# Altium PCB Radios_Comunitarias.PcbDoc (part 1 of 2)
Units mil, origin at the board's own origin, x right, y up, seen from the top; angles counter-clockwise.
Board outline 5905.51 x 3937.01 mil, 2 copper layers (Top Layer, Bottom Layer); 217 components, 199 nets, 908 pads, 113 vias.
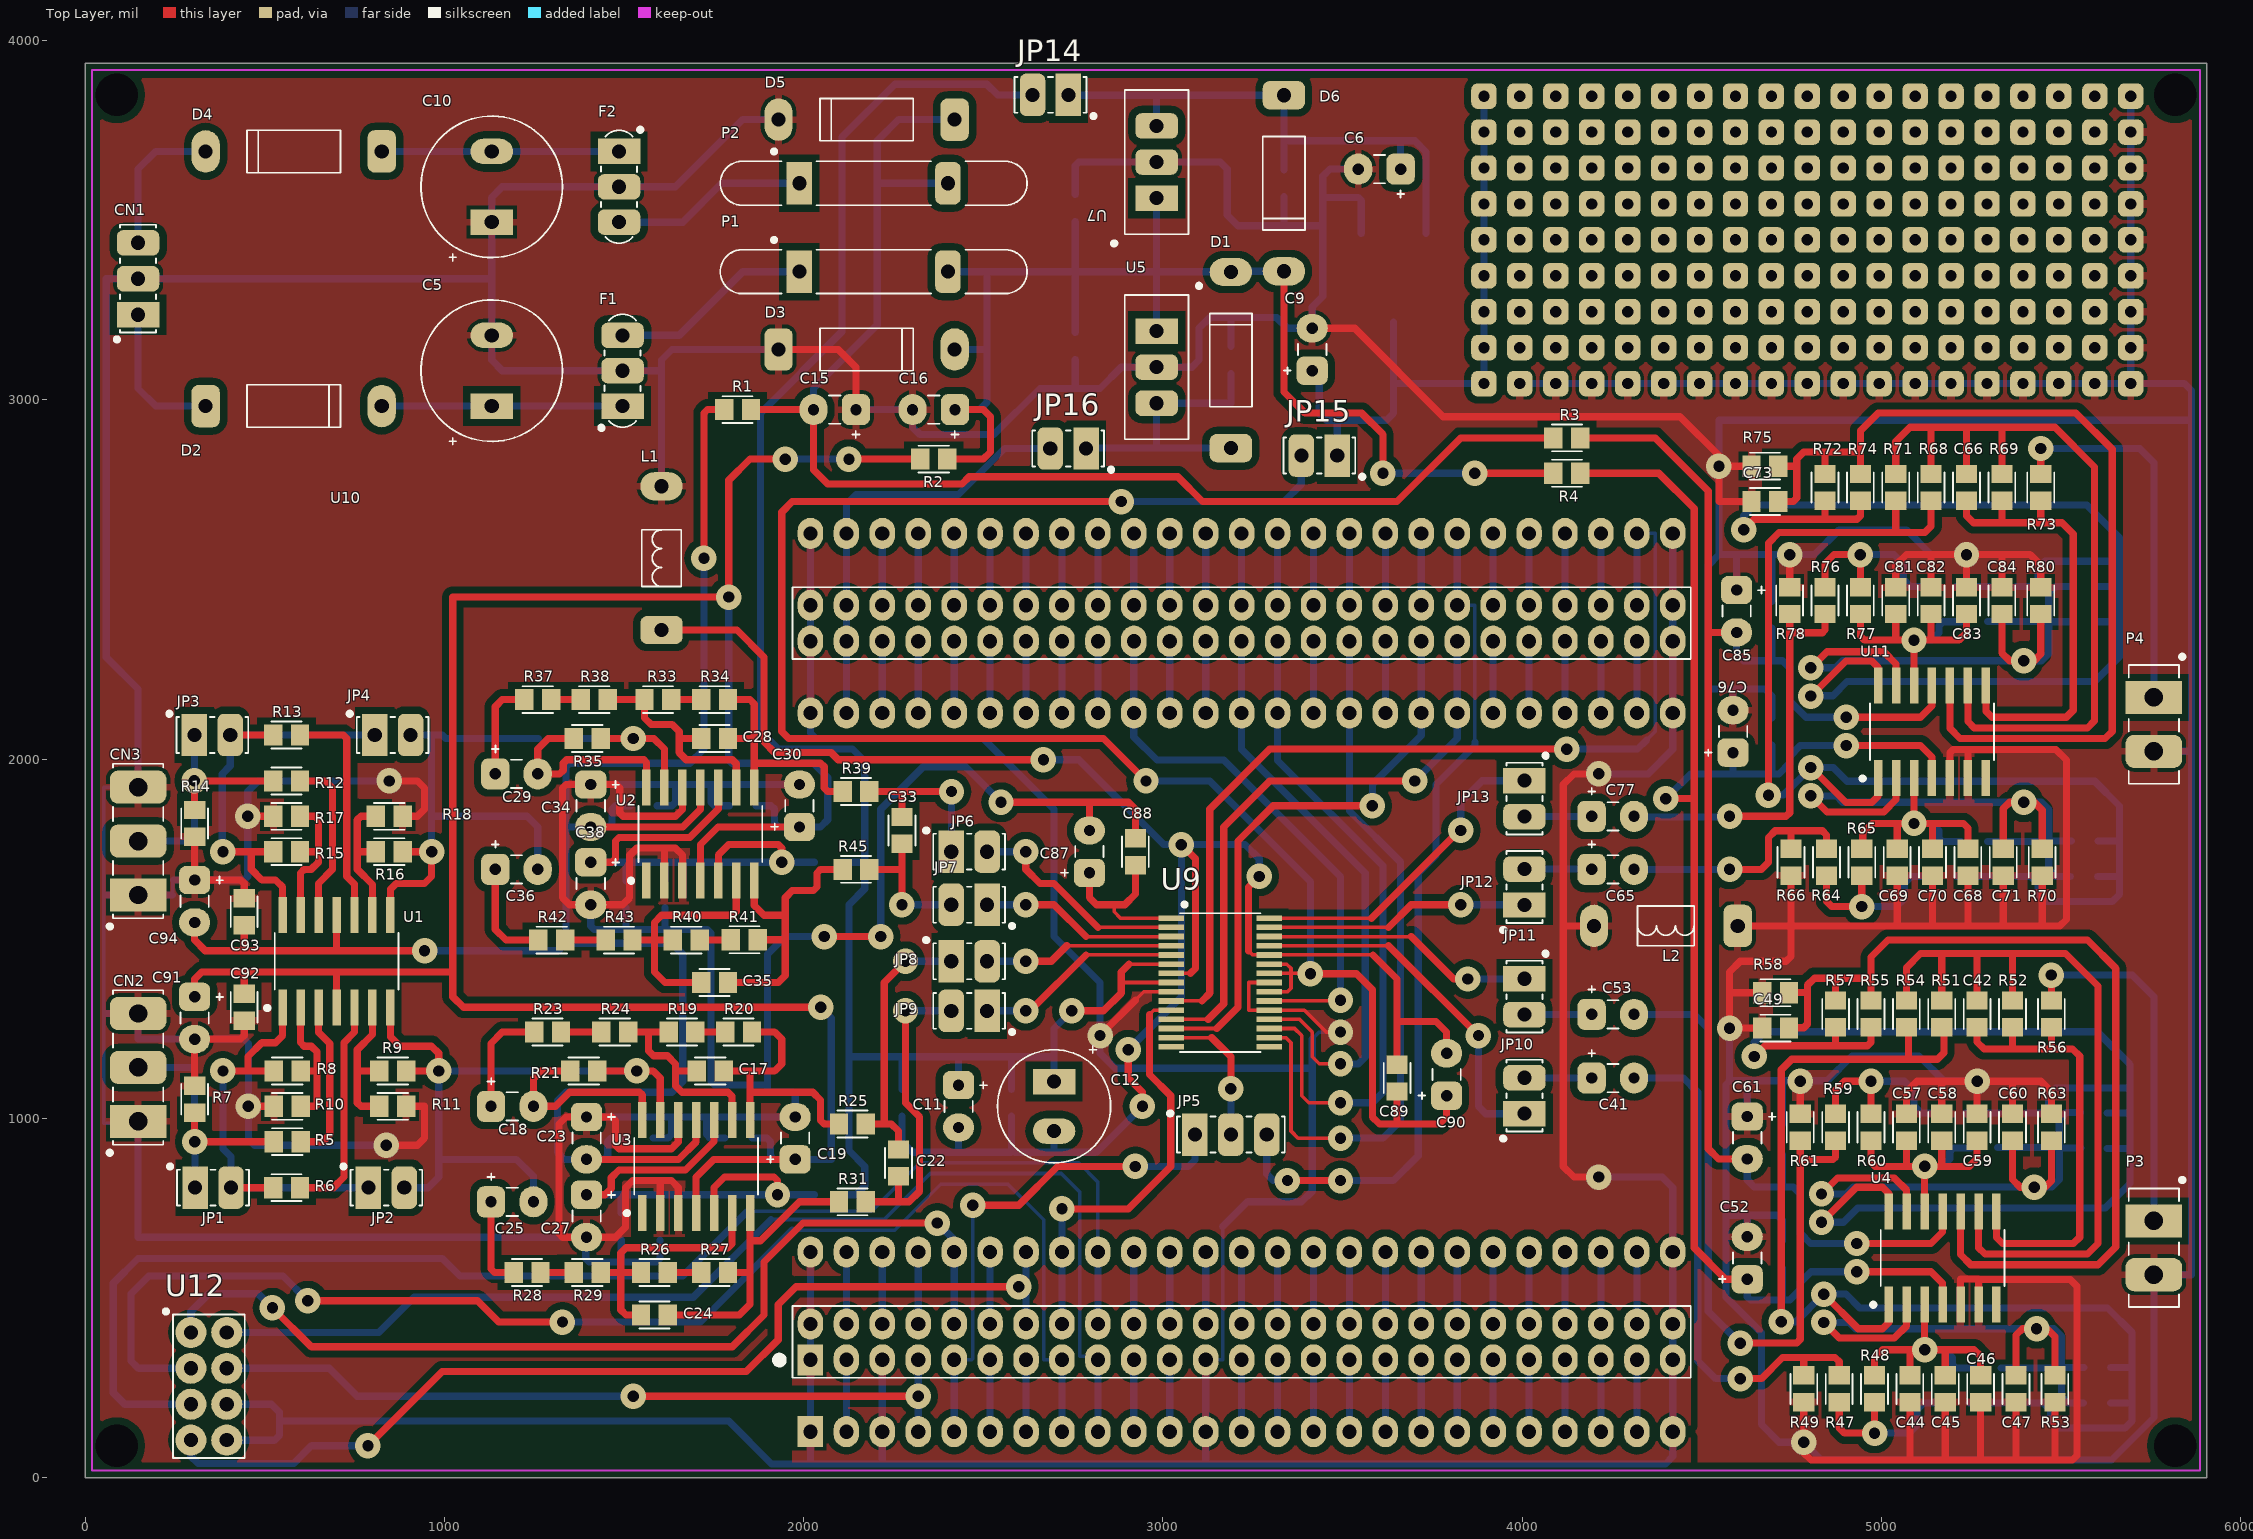
[diagram p0: Top Layer view]
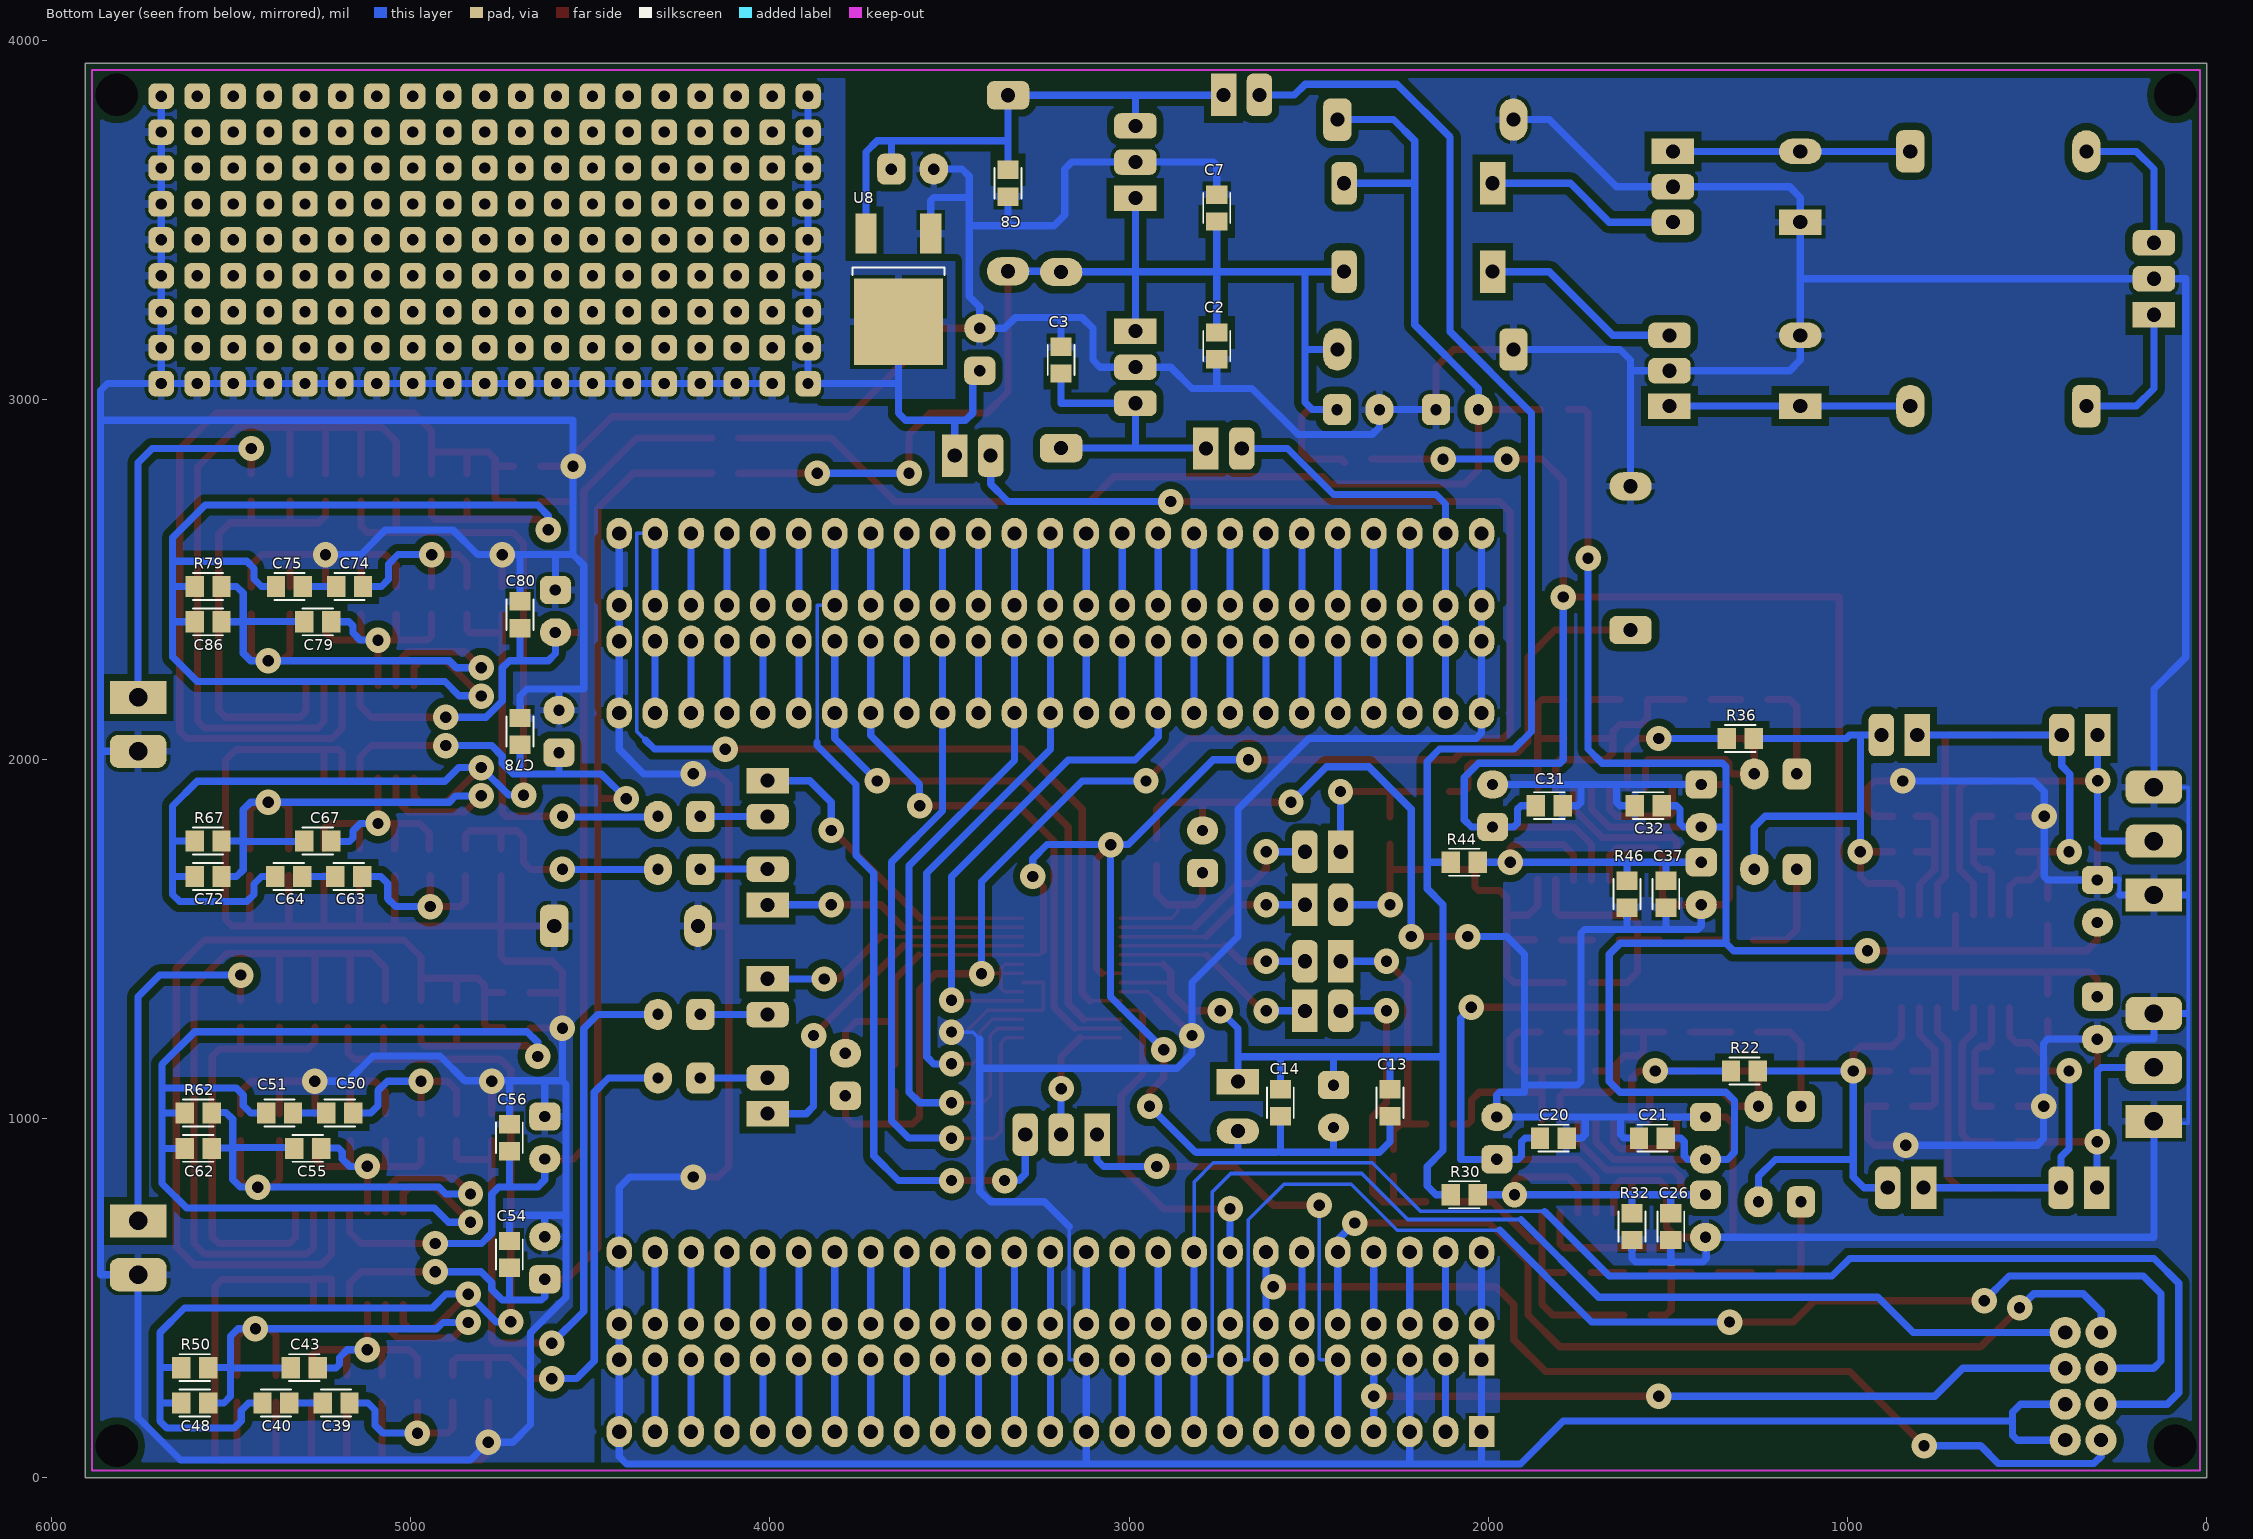
[diagram p1: Bottom Layer view, seen from below]

## Layer stack, top to bottom
Top Solder: solder mask 0.4, Solder Resist, Dk 3.5
Top Layer: signal copper 1.4
Dielectric1: dielectric 12.6, FR-4, Dk 4.8
Bottom Layer: signal copper 1.4
Bottom Solder: solder mask 0.4, Solder Resist, Dk 3.5

## Board outline
0,0 0,3937.01 5905.51,3937.01 5905.51,0

## Design rules (kind name [scope] priority, off if disabled: settings)
Clearance Clearance_Poly [InPolygon] p1: gap=20
Clearance [All] p2: gap=6
ComponentClearance Discovery [(InComponent('U10'))] p1: gap=0 collisioncheckmode=3 verticalgap=0 showdistances=FALSE
ComponentClearance [All] p2: gap=10 collisioncheckmode=3 verticalgap=10 showdistances=FALSE
DiffPairsRouting [All] p1: maxlimit=10 minlimit=10 mostfreqgap=10 toplayer_minwidth=10 toplayer_maxwidth=20 toplayer_prefwidth=10 bottomlayer_minwidth=10 bottomlayer_maxwidth=20 bottomlayer_prefwidth=10 maxuncoupledlength=500
FabricationTestPointUsage TestPointUsage [All] p1: valid=0 allowmultiple=FALSE
FabricationTestpoint Testpoint [All] p1: side=3 testpointundercomponent=TRUE minsize=40 maxsize=100 preferedsize=60 minholesize=0 maxholesize=40 preferedholesize=32 testpointgrid=1 allowsidetop=TRUE allowsidebottom=TRUE usegrid=TRUE gridtolerance=0.01
Height [All] p1: minheight=0 maxheight=1181.1 prefheight=500
PlaneConnect [All] p1: planeconnectstyle=Relief reliefexpansion=20 reliefentries=4 reliefconductorwidth=20 reliefairgap=20
PolygonConnect PolygonConnect_1 [IsVia] p1: connectstyle=Direct reliefconductorwidth=10 reliefentries=4 polygonreliefangle="90 Angle" airgapwidth=10
PolygonConnect [All] p2: connectstyle=Relief reliefconductorwidth=20 reliefentries=4 polygonreliefangle="90 Angle" airgapwidth=10
RoutingVias [All] p1: holewidth=31.5 width=70.87 viastyle="Through Hole" minholewidth=31.5 minwidth=70.87 maxholewidth=120 maxwidth=120
SolderMaskExpansion [All] p1: expansion=4
UnpouredPolygon [All] p1: allowunpoured=FALSE
Width [All] p1: maxlimit=20 minlimit=6 preferedwidth=10 minimp=50.000000 maximp=50.000000 favimp=50.000000
23 further rules are at their usual default settings.

## Classes and differential pairs
component class "Conector de entrada": CN2 CN3
component class "Conector de salida": P3 P4
component class "Discovery y AK4621": C87 C88 C89 C90 JP5
component class "Entrada canal derecho": C28 C29 C30 C31 C32 C33 C34 C35 C36 C37 C38 JP6 JP7 R33 R34 R35 R36 R37 R38 R39 R40 R41 R42 R43 R44 R45 R46 U2
component class "Entrada canal izquierdo": C17 C18 C19 C20 C21 C22 C23 C24 C25 C26 C27 JP8 JP9 R19 R20 R21 R22 R23 R24 R25 R26 R27 R28 R29 R30 R31 R32 U3
component class Fuentes: C2 C3 C4 C5 C6 C7 C8 C9 C10 C11 C12 C13 C14 C15 C16 CN1 D1 D2 D3 D4 D5 D6 F1 F2 JP14 JP15 JP16 L1 L2 P1 P2 R1 R2 R3 R4 U5 U7 U8
component class "Ganancia CH derecho": C91 C92 C93 C94 JP3 JP4 R12 R13 R14 R15 R16 R17 R18
component class "Ganancia CH izquierdo": JP1 JP2 R5 R6 R7 R8 R9 R10 R11 U1
component class "Salida canal derecho": C63 C64 C65 C66 C67 C68 C69 C70 C71 C72 C73 C74 C75 C76 C77 C78 C79 C80 C81 C82 C83 C84 C85 C86 JP12 JP13 R64 R65 R66 R67 R68 R69 R70 R71 R72 R73 R74 R75 R76 R77 R78 R79 R80 U11
component class "Salida canal izquierdo": C39 C40 C41 C42 C43 C44 C45 C46 C47 C48 C49 C50 C51 C52 C53 C54 C55 C56 C57 C58 C59 C60 C61 C62 JP10 JP11 R47 R48 R49 R50 R51 R52 R53 R54 R55 R56 R57 R58 R59 R60 R61 R62 R63 U4
differential pair AINL: +AINL_P -AINL_N
differential pair AINR: +AINR_P -AINR_N

## Components (designator, comment, footprint, x,y, rotation, side; value= is the part's Value field where it differs from the comment)
C2 "0.1uF 25V X7R" C_0805 2755.91,3149.61 r270 bottom
C3 "0.1uF 25V X7R" C_0805 3188.98,3110.24 r90 bottom
C5 "1000UF 16V E" "Capael_10x16 RAD" 1131.89,3080.71 r90 top
C6 "10uF 25V T" TANT 3602.36,3641.73 r180 top
C7 "0.1uF 25V X7R" C_0805 2755.91,3533.46 r90 bottom
C8 "0.1uF 25V X7R" C_0805 3336.61,3602.36 r270 bottom
C9 "10uF 25V T" TANT 3415.35,3139.76 r90 top
C10 "1000UF 16V E" "Capael_10x16 RAD" 1131.89,3592.52 r90 top
C11 "10uF 25V T" TANT 2431.1,1033.46 r270 top
C12 "470uF 25V E" "Capael_8x12 RAD" 2696.85,1033.46 r270 top
C13 "0.1uF 25V X7R" C_0805 2273.62,1043.31 r270 bottom
C14 "0.1uF 25V X7R" C_0805 2578.74,1043.31 r270 bottom
C15 "47uF 16V T" TANT 2086.61,2972.44 r180 top
C16 "47uF 16V T" TANT 2362.2,2972.44 r180 top
C17 "470pF 50V X7R" C_0805 1740.16,1131.89 r0 top
C18 "47uF 16V T" TANT 1188.98,1033.46 r0 top
C19 "10uF 25V T" TANT 1976.38,944.88 r90 top
C20 "0.1uF 25V X7R" C_0805 1818.9,944.88 r180 bottom
C21 "0.1uF 25V X7R" C_0805 1543.31,944.88 r0 bottom
C22 "10nF 25V X7R" C_0805 2263.78,875.98 r90 top
C23 "10uF 25V T" TANT 1395.67,944.88 r270 top
C24 "470pF 50V X7R" C_0805 1584.65,452.76 r0 top
C25 "47uF 16V T" TANT 1188.98,767.72 r0 top
C26 "0.1uF 25V X7R" C_0805 1492.13,698.82 r270 bottom
C27 "10uF 25V T" TANT 1395.67,728.35 r270 top
C28 "470pF 50V X7R" C_0805 1751.97,2057.09 r0 top
C29 "47uF 16V T" TANT 1200.79,1958.66 r0 top
C30 "10uF 25V T" TANT 1988.19,1870.08 r90 top
C31 "0.1uF 25V X7R" C_0805 1830.71,1870.08 r180 bottom
C32 "0.1uF 25V X7R" C_0805 1555.12,1870.08 r0 bottom
C33 "10nF 25V X7R" C_0805 2273.62,1801.18 r90 top
C34 "10uF 25V T" TANT 1407.48,1870.08 r270 top
C35 "470pF 50V X7R" C_0805 1751.97,1377.95 r0 top
C36 "47uF 16V T" TANT 1200.79,1692.91 r0 top
C37 "0.1uF 25V X7R" C_0805 1505.91,1624.02 r270 bottom
C38 "10uF 25V T" TANT 1407.48,1653.54 r270 top
C39 "1.8nF 50V COG" C_0805 5206.69,207.74 r180 bottom
C40 "1.5nF 50V COG" C_0805 5374.02,207.74 r180 bottom
C41 "100uF 16V T" TANT 4251.97,1112.2 r0 top
C42 "1nF 50V X7R" C_0805 5265.75,1290.42 r270 top
C43 "100pF 50V COG" C_0805 5295.28,306.17 r0 bottom
C44 "1.5nF 50V COG" C_0805 5078.74,247.11 r90 top
C45 "1.2nF 50V COG" C_0805 5177.17,247.11 r90 top
C46 "1.2nF 50V COG" C_0805 5275.59,247.11 r90 top
C47 "100pF 50V COG" C_0805 5374.02,247.11 r270 top
C48 "100pF 50V COG" C_0805 5600.39,207.74 r0 bottom
C49 "1nF 50V X7R" C_0805 4704.72,1251.05 r180 top
C50 "1.8nF 50V COG" C_0805 5196.85,1014.83 r180 bottom
C51 "1.5nF 50V COG" C_0805 5364.17,1014.83 r180 bottom
C52 "10uF 25V T" TANT 4625.98,611.28 r90 top
C53 "100uF 16V T" TANT 4251.97,1289.37 r0 top
C54 "0.1uF 25V X7R" C_0805 4724.41,621.13 r90 bottom
C55 "100pF 50V COG" C_0805 5285.43,916.4 r0 bottom
C56 "0.1uF 25V X7R" C_0805 4724.41,945.93 r90 bottom
C57 "1.5nF 50V COG" C_0805 5068.9,975.46 r270 top
C58 "1.2nF 50V COG" C_0805 5167.32,975.46 r270 top
C59 "1.2nF 50V COG" C_0805 5265.75,975.46 r270 top
C60 "100pF 50V COG" C_0805 5364.17,975.46 r90 top
C61 "10uF 25V T" TANT 4625.98,945.93 r270 top
C62 "100pF 50V COG" C_0805 5590.55,916.4 r0 bottom
C63 "1.8nF 50V COG" C_0805 5171.26,1673.23 r180 bottom
C64 "1.5nF 50V COG" C_0805 5338.58,1673.23 r180 bottom
C65 "100uF 16V T" TANT 4251.97,1692.91 r0 top
C66 "1nF 50V X7R" C_0805 5236.22,2755.91 r270 top
C67 "100pF 50V COG" C_0805 5257.87,1771.65 r0 bottom
C68 "1.5nF 50V COG" C_0805 5240.16,1712.6 r90 top
C69 "1.2nF 50V COG" C_0805 5043.31,1712.6 r90 top
C70 "1.2nF 50V COG" C_0805 5141.73,1712.6 r90 top
C71 "100pF 50V COG" C_0805 5338.58,1712.6 r270 top
C72 "100pF 50V COG" C_0805 5562.99,1673.23 r0 bottom
C73 "1nF 50V X7R" C_0805 4675.2,2716.54 r180 top
C74 "1.8nF 50V COG" C_0805 5169.29,2480.32 r180 bottom
C75 "1.5nF 50V COG" C_0805 5336.61,2480.32 r180 bottom
C76 "10uF 25V T" TANT 4586.61,2076.77 r90 top
C77 "100uF 16V T" TANT 4251.97,1840.55 r0 top
C78 "0.1uF 25V X7R" C_0805 4694.88,2076.77 r90 bottom
C79 "100pF 50V COG" C_0805 5257.87,2381.89 r0 bottom
C80 "0.1uF 25V X7R" C_0805 4694.88,2401.57 r90 bottom
C81 "1.5nF 50V COG" C_0805 5039.37,2440.95 r270 top
C82 "1.2nF 50V COG" C_0805 5137.8,2440.95 r270 top
C83 "1.2nF 50V COG" C_0805 5236.22,2440.95 r270 top
C84 "100pF 50V COG" C_0805 5334.65,2440.95 r90 top
C85 "10uF 25V T" TANT 4596.46,2411.42 r270 top
C86 "100pF 50V COG" C_0805 5562.99,2381.89 r0 bottom
C87 "10uF 25V T" TANT 2795.28,1742.13 r90 top
C88 "0.1uF 25V X7R" C_0805 2923.23,1742.13 r90 top
C89 "10uF 25V T" TANT 3789.37,1122.05 r90 top
C90 "0.1uF 25V X7R" C_0805 3651.57,1112.2 r90 top
C91 "10uF 25V T" TANT 305.12,1279.53 r270 top
C92 "0.1uF 25V X7R" C_0805 442.91,1309.06 r270 top
C93 "0.1uF 25V X7R" C_0805 442.91,1574.8 r90 top
C94 "10uF 25V T" TANT 305.12,1604.33 r270 top
CN1 "Bornera P2.54mm" Conn_3_1 147.64,3336.61 r90 top
CN2 "AC3FDZ Amphenol" XLR_Ext 147.64,1141.73 r90 top
CN3 "AC3FDZ Amphenol" XLR_Ext 147.64,1771.65 r90 top
D1 "1N5819" 59-04 3188.98,3110.24 r90 top
D2 "1N5819" 59-04 580.71,2982.28 r0 top
D3 "TVS 36V 600W" 59-04 2175.2,3139.76 r0 top
D4 "1N5819" 59-04 580.71,3690.94 r180 top
D5 "TVS 36V 600W" 59-04 2175.2,3779.53 r180 top
D6 "1N5819" 59-04 3336.61,3602.36 r270 top
F1 "IND EMI SUP FILT HAS" EMIFIL_DSS6_S 1496.06,3080.71 r90 top
F2 "IND EMI SUP FILT HAS" EMIFIL_DSS6_S 1486.22,3592.52 r270 top
JP1 "Jumper 2x1" Conn_2_1 356.3,807.09 r0 top
JP2 "Jumper 2x1" Conn_2_1 838.58,807.09 r0 top
JP3 "Jumper 2x1" Conn_2_1 354.33,2066.93 r0 top
JP4 "Jumper 2x1" Conn_2_1 856.3,2066.93 r0 top
JP5 "Jumper 3x1" Conn_3_1 3188.98,954.72 r0 top
JP6 "Jumper 2x1" Conn_2_1 2460.63,1742.13 r0 top
JP7 "Jumper 2x1" Conn_2_1 2460.63,1594.49 r180 top
JP8 "Jumper 2x1" Conn_2_1 2460.63,1437.01 r0 top
JP9 "Jumper 2x1" Conn_2_1 2460.63,1299.21 r180 top
JP10 "Jumper 2x1" Conn_2_1 4005.91,1062.99 r90 top
JP11 "Jumper 2x1" Conn_2_1 4005.91,1338.58 r270 top
JP12 "Jumper 2x1" Conn_2_1 4005.91,1643.7 r90 top
JP13 "Jumper 2x1" Conn_2_1 4005.91,1889.76 r270 top
JP14 "Jumper 2x1" Conn_2_1 2687.01,3848.43 r180 top
JP15 "Jumper 2x1" Conn_2_1 3435.04,2844.49 r180 top
JP16 "Jumper 2x1" Conn_2_1 2736.22,2864.17 r180 top
L1 "FERRITE BEAD" EC22/KC204 1604.33,2559.06 r90 top
L2 "FERRITE BEAD" EC22/KC204 4399.61,1535.43 r180 top
P1 "JK60-300" JK60-300 2194.88,3356.3 r0 top
P2 "JK60-300" JK60-300 2194.88,3602.36 r0 top
P3 "Hembra BNC a chasis" BNC_Ext 5757.87,639.76 r270 top
P4 "Hembra BNC a chasis" BNC_Ext 5757.87,2096.46 r270 top
R1 "10R 5% 1/16W" R_0805 1816.14,2972.44 r0 top
R2 "10R 5% 1/16W" R_0805 2362.2,2834.65 r0 top
R3 "10R 5% 1/16W" R_0805 4124.02,2893.7 r180 top
R4 "10R 5% 1/16W" R_0805 4124.02,2795.28 r180 top
R5 "4K7 5% 1/16W" R_0805 562.99,935.04 r180 top
R6 "4K7 5% 1/16W" R_0805 561.02,807.09 r180 top
R7 "47K 5% 1/16W" R_0805 305.12,1053.15 r270 top
R8 "3K3 5% 1/10W" R_0805 562.99,1131.89 r0 top
R9 "3K3 5% 1/10W" R_0805 856.3,1131.89 r180 top
R10 "1K 5% 1/16W" R_0805 562.99,1033.46 r180 top
R11 "1K 5% 1/16W" R_0805 856.3,1033.46 r0 top
R12 "4K7 5% 1/16W" R_0805 561.02,1938.98 r180 top
R13 "4K7 5% 1/16W" R_0805 561.02,2066.93 r180 top
R14 "47K 5% 1/16W" R_0805 305.12,1820.87 r90 top
R15 "3K3 5% 1/10W" R_0805 561.02,1742.13 r0 top
R16 "3K3 5% 1/10W" R_0805 846.46,1742.13 r180 top
R17 "1K 5% 1/16W" R_0805 561.02,1840.55 r180 top
R18 "1K 5% 1/16W" R_0805 846.46,1840.55 r0 top
R19 "1K2 5% 1/10W" R_0805 1661.42,1240.16 r180 top
R20 "1K8 5% 1/10W" R_0805 1818.9,1240.16 r180 top
R21 "4K7 5% 1/16W" R_0805 1387.8,1131.89 r0 top
R22 "4K7 5% 1/16W" R_0805 1287.4,1131.89 r180 bottom
R23 "1K2 5% 1/10W" R_0805 1287.4,1240.16 r180 top
R24 "1K8 5% 1/10W" R_0805 1474.41,1240.16 r180 top
R25 "22R 5% 1/16W" R_0805 2135.83,984.25 r180 top
R26 "1K2 5% 1/10W" R_0805 1584.65,570.87 r180 top
R27 "1K8 5% 1/10W" R_0805 1751.97,570.87 r180 top
R28 "1K2 5% 1/10W" R_0805 1230.32,570.87 r180 top
R29 "1K8 5% 1/10W" R_0805 1397.64,570.87 r180 top
R30 "10K 5% 1/10W" R_0805 2066.93,787.4 r0 bottom
R31 "22R 5% 1/16W" R_0805 2135.83,767.72 r180 top
R32 "10K 5% 1/10W" R_0805 1600.39,698.82 r90 bottom
R33 "1K2 5% 1/10W" R_0805 1594.49,2165.35 r180 top
R34 "1K8 5% 1/10W" R_0805 1751.97,2165.35 r180 top
R35 "4K7 5% 1/16W" R_0805 1397.64,2057.09 r0 top
R36 "4K7 5% 1/16W" R_0805 1299.21,2057.09 r180 bottom
R37 "1K2 5% 1/10W" R_0805 1259.84,2165.35 r180 top
R38 "1K8 5% 1/10W" R_0805 1417.32,2165.35 r180 top
R39 "22R 5% 1/16W" R_0805 2145.67,1909.45 r180 top
R40 "1K2 5% 1/10W" R_0805 1673.23,1496.06 r180 top
R41 "1K8 5% 1/10W" R_0805 1835.03,1496.98 r180 top
R42 "1K2 5% 1/10W" R_0805 1299.21,1496.06 r180 top
R43 "1K8 5% 1/10W" R_0805 1486.22,1496.06 r180 top
R44 "10K 5% 1/10W" R_0805 2066.93,1712.6 r0 bottom
R45 "22R 5% 1/16W" R_0805 2145.67,1692.91 r180 top
R46 "10K 5% 1/10W" R_0805 1614.17,1624.02 r90 bottom
R47 "330R 5% 1/10W" R_0805 4881.89,247.11 r270 top
R48 "180R 5% 1/10W" R_0805 4980.31,247.11 r90 top
R49 "10K 5% 1/10W" R_0805 4783.46,247.11 r90 top
R50 "680R 5% 1/10W" R_0805 5600.39,306.17 r0 bottom
R51 "680R 5% 1/10W" R_0805 5167.32,1290.42 r90 top
R52 "560R 5% 1/10W" R_0805 5364.17,1290.42 r90 top
R53 "1K2 5% 1/10W" R_0805 5482.28,247.11 r270 top
R54 "1K5 5% 1/10W" R_0805 5068.9,1290.42 r90 top
R55 "1K5 5% 1/10W" R_0805 4970.47,1290.42 r90 top
R56 "100R 5% 1/16W" R_0805 5472.44,1290.42 r90 top
R57 "680R 5% 1/10W" R_0805 4872.05,1290.42 r90 top
R58 "560R 5% 1/10W" R_0805 4704.72,1349.47 r0 top
R59 "330R 5% 1/10W" R_0805 4872.05,975.46 r90 top
R60 "180R 5% 1/10W" R_0805 4970.47,975.46 r270 top
R61 "10K 5% 1/10W" R_0805 4773.62,975.46 r270 top
R62 "680R 5% 1/10W" R_0805 5590.55,1014.83 r0 bottom
R63 "1K2 5% 1/10W" R_0805 5472.44,975.46 r90 top
R64 "330R 5% 1/10W" R_0805 4846.46,1712.6 r270 top
R65 "180R 5% 1/10W" R_0805 4944.88,1712.6 r90 top
R66 "10K 5% 1/10W" R_0805 4748.03,1712.6 r90 top
R67 "680R 5% 1/10W" R_0805 5562.99,1771.65 r0 bottom
R68 "680R 5% 1/10W" R_0805 5137.8,2755.91 r90 top
R69 "560R 5% 1/10W" R_0805 5334.65,2755.91 r90 top
R70 "1K2 5% 1/10W" R_0805 5446.85,1712.6 r270 top
R71 "1K5 5% 1/10W" R_0805 5039.37,2755.91 r90 top
R72 "1K5 5% 1/10W" R_0805 4842.52,2755.91 r90 top
R73 "100R 5% 1/16W" R_0805 5442.91,2755.91 r90 top
R74 "680R 5% 1/10W" R_0805 4940.94,2755.91 r90 top
R75 "560R 5% 1/10W" R_0805 4675.2,2814.96 r0 top
R76 "330R 5% 1/10W" R_0805 4842.52,2440.95 r90 top
R77 "180R 5% 1/10W" R_0805 4940.94,2440.95 r270 top
R78 "10K 5% 1/10W" R_0805 4744.09,2440.95 r270 top
R79 "680R 5% 1/10W" R_0805 5562.99,2480.32 r0 bottom
R80 "1K2 5% 1/10W" R_0805 5442.91,2440.95 r90 top
U1 "4OPAMP" SOIC14 700,1437.01 r0 top
U2 "4OPAMP" SOIC14 1712.6,1791.34 r0 top
U3 "4OPAMP" SOIC14 1700.79,866.14 r0 top
U4 "4OPAMP" SOIC14 5169.68,611.28 r0 top
U5 "LM7805CDT" TO-220-3 2982.28,3090.55 r270 top
U7 "LM7805CDT" TO-220-3 2982.28,3661.42 r90 top
U8 "LM1117DTX-3.3/NOPB" DPAK 3641.73,3307.09 r0 bottom
U9 "AK4621" AK4621 3159.45,1377.95 r270 top
U10 "STM32F4Discovery" STM32F4DISCOVERY 2596.85,1377.95 r90 top
U11 "4OPAMP" SOIC14 5140.16,2075.72 r0 top
U12 "DDS" Conn_2x4 344.49,354.33 r0 top
? "EXPANSION" EXPANSION 4793.31,3444.88 r180 top

## Footprints (in the part's own frame and the unit in brackets; to place one, negate y for a bottom-side part, rotate by r counter-clockwise, add the part's x,y. Pads: shape width x height; smd on the part's side, far side on the other; paste and mask are expansions set on the pad)
59-04 [mm] "Diodos TH 59-04"
  rrect50% 2x3 hole 1: 1(-6.223,0)
  oval 2x3 hole 1: 2(6.223,0)
  silkscreen extent -3.3,-1.5 3.3,1.5
AK4621 [mm] "24bits 192kHz Stereo Audio CODEC SMD (VSOP-30)"
  rect 0.4x1.8 smd: 1(-4.55,-3.45) 2(-3.9,-3.45) 3(-3.25,-3.45) 4(-2.6,-3.45) 5(-1.95,-3.45) 6(-1.3,-3.45) 7(-0.65,-3.45) 8(0,-3.45) 9(0.65,-3.45) 10(1.3,-3.45) 11(1.95,-3.45) 12(2.6,-3.45) 13(3.25,-3.45) 14(3.9,-3.45) 15(4.55,-3.45) 16(4.55,3.45) 17(3.9,3.45) 18(3.25,3.45) 19(2.6,3.45) 20(1.95,3.45) 21(1.3,3.45) 22(0.65,3.45) 23(0,3.45) 24(-0.65,3.45) 25(-1.3,3.45) 26(-1.95,3.45) 27(-2.6,3.45) 28(-3.25,3.45) 29(-3.9,3.45) 30(-4.55,3.45)
  silkscreen extent -5.55,-2.85 4.9,2.85
BNC_Ext [mm] "Cables para el BNC que va en el chasis"
  rect 2.34x4 hole 1.3: 1(-1.905,0)
  rrect50% 2.34x4 hole 1.3: 2(1.905,0)
  silkscreen extent -4.82,-1.78 4.19,2.04
C_0805 [mm] "Capacitor SMD 0805"
  rect 1.3x1.5 smd: 1(-0.95,0) 2(0.95,0)
  silkscreen extent -1.07,-0.95 1.07,0.95
"Capael_8x12 RAD" [mm] "Capacitor radial 8x12 Electrolitico"
  rect 1.8x3 hole 1: 1(-1.75,0)
  oval 1.8x3 hole 1: 2(1.75,0)
  silkscreen extent -4.25,-4 4,4
"Capael_10x16 RAD" [mm] "Capacitor radial 10x16 Electrolitico"
  rect 1.8x3 hole 1: 1(-2.5,0)
  oval 1.8x3 hole 1: 2(2.5,0)
  silkscreen extent -5.24,-5 5,5
Conn_2_1 [mm] "Conector de 2x1"
  rect 1.8x3 hole 1: 1(-1.27,0)
  rrect50% 1.8x3 hole 1: 2(1.27,0)
  silkscreen extent -3.07,-1.27 2.54,1.54
Conn_2x4 [mm] "Conector de 2x4"
  round 2.2 hole 1: 1(-1.27,1.27) 2(1.27,1.27) 3(-1.27,-1.27) 4(1.27,-1.27) 5(-1.27,-3.81) 6(1.27,-3.81) 7(-1.27,-6.35) 8(1.27,-6.35)
  silkscreen extent -3.07,-7.62 2.54,2.79
Conn_3_1 [mm] "Conector de 3x1"
  rect 1.8x3 hole 1: 1(-2.54,0)
  rrect50% 1.8x3 hole 1: 2(0,0) 3(2.54,0)
  silkscreen extent -4.32,-1.27 3.81,1.54
DPAK [mm]
  rect 1.5x2.8 smd: 1(-2.286,-3.95) 3(2.286,-3.95)
  rect 6.3x6.1 smd: 2(0,2.3)
  silkscreen extent -3.25,-1.55 3.25,-1.02
EC22/KC204 [mm] "Ferrite bead TH"
  rrect50% 2x3 hole 1: 1(-5.08,0)
  oval 2x3 hole 1: 2(5.08,0)
  silkscreen extent -2,-1.4 2,1.4
EMIFIL_DSS6_S [mm] "Emi Filter DSS6 series straight type"
  rect 1.8x3 hole 1: 1(-2.5,0)
  rrect50% 1.8x3 hole 1: 2(0,0) 3(2.5,0)
  silkscreen extent -4.07,-1.27 4,1.54
EXPANSION [mm]
  rrect50% 1.8x1.8 hole 0.8: ""(-22.86,-10.16) ""(-22.86,-7.62) ""(-22.86,-5.08) ""(-22.86,-2.54) ""(-22.86,0) ""(-22.86,2.54) ""(-22.86,5.08) ""(-22.86,7.62) ""(-22.86,10.16) ""(-20.32,-10.16) ""(-20.32,-7.62) ""(-20.32,-5.08) ""(-20.32,-2.54) ""(-20.32,0) ""(-20.32,2.54) ""(-20.32,5.08) ""(-20.32,7.62) ""(-20.32,10.16) ""(-17.78,-10.16) ""(-17.78,-7.62) ""(-17.78,-5.08) ""(-17.78,-2.54) ""(-17.78,0) ""(-17.78,2.54) ""(-17.78,5.08) ""(-17.78,7.62) ""(-17.78,10.16) ""(-15.24,-10.16) ""(-15.24,-7.62) ""(-15.24,-5.08) ""(-15.24,-2.54) ""(-15.24,0) ""(-15.24,2.54) ""(-15.24,5.08) ""(-15.24,7.62) ""(-15.24,10.16) ""(-12.7,7.62) ""(-12.7,10.16) ""(-12.7,-5.08) ""(-12.7,-2.54) ""(-12.7,0) ""(-12.7,2.54) ""(-12.7,5.08) ""(-12.7,-10.16) ""(-12.7,-7.62) ""(-10.16,7.62) ""(-10.16,10.16) ""(-10.16,-5.08) ""(-10.16,-2.54) ""(-10.16,0) ""(-10.16,2.54) ""(-10.16,5.08) ""(-10.16,-10.16) ""(-10.16,-7.62) ""(-7.62,7.62) ""(-7.62,10.16) ""(-7.62,-5.08) ""(-7.62,-2.54) ""(-7.62,0) ""(-7.62,2.54) ""(-7.62,5.08) ""(-7.62,-10.16) ""(-7.62,-7.62) ""(-5.08,10.16) ""(-5.08,5.08) ""(-5.08,7.62) ""(-5.08,-2.54) ""(-5.08,0) ""(-5.08,2.54) ""(-5.08,-7.62) ""(-5.08,-5.08) ""(-5.08,-10.16) ""(-2.54,7.62) ""(-2.54,10.16) ""(-2.54,5.08) ""(-2.54,2.54) ""(-2.54,0) ""(-2.54,-2.54) ""(-2.54,-5.08) ""(-2.54,-10.16) ""(-2.54,-7.62) ""(0,10.16) ""(0,7.62) ""(0,5.08) ""(0,2.54) ""(0,0) ""(0,-2.54) ""(0,-5.08) ""(0,-7.62) ""(0,-10.16) ""(2.54,7.62) ""(2.54,10.16) ""(2.54,5.08) ""(2.54,2.54) ""(2.54,0) ""(2.54,-2.54) ""(2.54,-5.08) ""(2.54,-10.16) ""(2.54,-7.62) ""(5.08,10.16) ""(5.08,5.08) ""(5.08,7.62) ""(5.08,-2.54) ""(5.08,0) ""(5.08,2.54) ""(5.08,-7.62) ""(5.08,-5.08) ""(5.08,-10.16) ""(7.62,7.62) ""(7.62,10.16) ""(7.62,-5.08) ""(7.62,-2.54) ""(7.62,0) ""(7.62,2.54) ""(7.62,5.08) ""(7.62,-10.16) ""(7.62,-7.62) ""(10.16,7.62) ""(10.16,10.16) ""(10.16,-5.08) ""(10.16,-2.54) ""(10.16,0) ""(10.16,2.54) ""(10.16,5.08) ""(10.16,-10.16) ""(10.16,-7.62) ""(12.7,7.62) ""(12.7,10.16) ""(12.7,-5.08) ""(12.7,-2.54) ""(12.7,0) ""(12.7,2.54) ""(12.7,5.08) ""(12.7,-10.16) ""(12.7,-7.62) ""(15.24,-10.16) ""(15.24,-7.62) ""(15.24,-5.08) ""(15.24,-2.54) ""(15.24,0) ""(15.24,2.54) ""(15.24,5.08) ""(15.24,7.62) ""(15.24,10.16) ""(17.78,-10.16) ""(17.78,-7.62) ""(17.78,-5.08) ""(17.78,-2.54) ""(17.78,0) ""(17.78,2.54) ""(17.78,5.08) ""(17.78,7.62) ""(17.78,10.16) ""(20.32,-10.16) ""(20.32,-7.62) ""(20.32,-5.08) ""(20.32,-2.54) ""(20.32,0) ""(20.32,2.54) ""(20.32,5.08) ""(20.32,7.62) ""(20.32,10.16) ""(22.86,-10.16) ""(22.86,-7.62) ""(22.86,-5.08) ""(22.86,-2.54) ""(22.86,0) ""(22.86,2.54) ""(22.86,5.08) ""(22.86,7.62) ""(22.86,10.16)
JK60-300 [mm] "Poly de JK60-300"
  rect 1.8x3 hole 1: 1(-5.25,0)
  rrect50% 1.8x3 hole 1: 2(5.25,0)
  silkscreen extent -10.85,-1.55 10.85,2.29
R_0805 [mm] "Resistencia SMD 0805"
  rect 1.3x1.5 smd: 1(-0.95,0) 2(0.95,0)
  silkscreen extent -1.07,-0.95 1.07,0.95
SOIC14 [mil] "SOIC14"
  rect 23.62x100 smd: 1(-150,-129) 2(-100,-129) 3(-50,-129) 4(0,-129) 5(50,-129) 6(100,-129) 7(150,-129) 8(150,129) 9(100,129) 10(50,129) 11(0,129) 12(-50,129) 13(-100,129) 14(-150,129)
  silkscreen extent -194,-131 172,79
STM32F4DISCOVERY [mm] "STM32F4DISCOVERY (STM32F407VGT6)"
  rect 2.2x1.8 hole 1: P1.1(-31.75,14.68) P1.1(-26.67,14.68)
  oval 2.2x1.8 hole 1: P1.2(-24.13,14.68) P1.2(-19.05,14.68) P1.3(-31.75,12.14) P1.3(-26.67,12.14) P1.4(-24.13,12.14) P1.4(-19.05,12.14) P1.5(-31.75,9.6) P1.5(-26.67,9.6) P1.6(-24.13,9.6) P1.6(-19.05,9.6) P1.7(-31.75,7.06) P1.7(-26.67,7.06) P1.8(-24.13,7.06) P1.8(-19.05,7.06) P1.9(-31.75,4.52) P1.9(-26.67,4.52) P1.10(-24.13,4.52) P1.10(-19.05,4.52) P1.11(-31.75,1.98) P1.11(-26.67,1.98) P1.12(-24.13,1.98) P1.12(-19.05,1.98) P1.13(-31.75,-0.56) P1.13(-26.67,-0.56) P1.14(-24.13,-0.56) P1.14(-19.05,-0.56) P1.15(-31.75,-3.1) P1.15(-26.67,-3.1) P1.16(-24.13,-3.1) P1.16(-19.05,-3.1) P1.17(-31.75,-5.64) P1.17(-26.67,-5.64) P1.18(-24.13,-5.64) P1.18(-19.05,-5.64) P1.19(-31.75,-8.18) P1.19(-26.67,-8.18) P1.20(-24.13,-8.18) P1.20(-19.05,-8.18) P1.21(-31.75,-10.72) P1.21(-26.67,-10.72) P1.22(-24.13,-10.72) P1.22(-19.05,-10.72) P1.23(-31.75,-13.26) P1.23(-26.67,-13.26) P1.24(-24.13,-13.26) P1.24(-19.05,-13.26) P1.25(-31.75,-15.8) P1.25(-26.67,-15.8) P1.26(-24.13,-15.8) P1.26(-19.05,-15.8) P1.27(-31.75,-18.34) P1.27(-26.67,-18.34) P1.28(-24.13,-18.34) P1.28(-19.05,-18.34) P1.29(-31.75,-20.88) P1.29(-26.67,-20.88) P1.30(-24.13,-20.88) P1.30(-19.05,-20.88) P1.31(-31.75,-23.42) P1.31(-26.67,-23.42) P1.32(-24.13,-23.42) P1.32(-19.05,-23.42) P1.33(-31.75,-25.96) P1.33(-26.67,-25.96) P1.34(-24.13,-25.96) P1.34(-19.05,-25.96) P1.35(-31.75,-28.5) P1.35(-26.67,-28.5) P1.36(-24.13,-28.5) P1.36(-19.05,-28.5) P1.37(-31.75,-31.04) P1.37(-26.67,-31.04) P1.38(-24.13,-31.04) P1.38(-19.05,-31.04) P1.39(-31.75,-33.58) P1.39(-26.67,-33.58) P1.40(-24.13,-33.58) P1.40(-19.05,-33.58) P1.41(-31.75,-36.12) P1.41(-26.67,-36.12) P1.42(-24.13,-36.12) P1.42(-19.05,-36.12) P1.43(-31.75,-38.66) P1.43(-26.67,-38.66) P1.44(-24.13,-38.66) P1.44(-19.05,-38.66) P1.45(-31.75,-41.2) P1.45(-26.67,-41.2) P1.46(-24.13,-41.2) P1.46(-19.05,-41.2) P1.47(-31.75,-43.74) P1.47(-26.67,-43.74) P1.48(-24.13,-43.74) P1.48(-19.05,-43.74) P1.49(-31.75,-46.28) P1.49(-26.67,-46.28) P1.50(-24.13,-46.28) P1.50(-19.05,-46.28) P2.1(19.05,14.68) P2.1(24.13,14.68) P2.2(26.67,14.68) P2.2(31.75,14.68) P2.3(19.05,12.14) P2.3(24.13,12.14) P2.4(26.67,12.14) P2.4(31.75,12.14) P2.5(19.05,9.6) P2.5(24.13,9.6) P2.6(26.67,9.6) P2.6(31.75,9.6) P2.7(19.05,7.06) P2.7(24.13,7.06) P2.8(26.67,7.06) P2.8(31.75,7.06) P2.9(19.05,4.52) P2.9(24.13,4.52) P2.10(26.67,4.52) P2.10(31.75,4.52) P2.11(19.05,1.98) P2.11(24.13,1.98) P2.12(26.67,1.98) P2.12(31.75,1.98) P2.13(19.05,-0.56) P2.13(24.13,-0.56) P2.14(26.67,-0.56) P2.14(31.75,-0.56) P2.15(19.05,-3.1) P2.15(24.13,-3.1) P2.16(26.67,-3.1) P2.16(31.75,-3.1) P2.17(19.05,-5.64) P2.17(24.13,-5.64) P2.18(26.67,-5.64) P2.18(31.75,-5.64) P2.19(19.05,-8.18) P2.19(24.13,-8.18) P2.20(26.67,-8.18) P2.20(31.75,-8.18) P2.21(19.05,-10.72) P2.21(24.13,-10.72) P2.22(26.67,-10.72) P2.22(31.75,-10.72) P2.23(19.05,-13.26) P2.23(24.13,-13.26) P2.24(26.67,-13.26) P2.24(31.75,-13.26) P2.25(19.05,-15.8) P2.25(24.13,-15.8) P2.26(26.67,-15.8) P2.26(31.75,-15.8) P2.27(19.05,-18.34) P2.27(24.13,-18.34) P2.28(26.67,-18.34) P2.28(31.75,-18.34) P2.29(19.05,-20.88) P2.29(24.13,-20.88) P2.30(26.67,-20.88) P2.30(31.75,-20.88) P2.31(19.05,-23.42) P2.31(24.13,-23.42) P2.32(26.67,-23.42) P2.32(31.75,-23.42) P2.33(19.05,-25.96) P2.33(24.13,-25.96) P2.34(26.67,-25.96) P2.34(31.75,-25.96) P2.35(19.05,-28.5) P2.35(24.13,-28.5) P2.36(26.67,-28.5) P2.36(31.75,-28.5) P2.37(19.05,-31.04) P2.37(24.13,-31.04) P2.38(26.67,-31.04) P2.38(31.75,-31.04) P2.39(19.05,-33.58) P2.39(24.13,-33.58) P2.40(26.67,-33.58) P2.40(31.75,-33.58) P2.41(19.05,-36.12) P2.41(24.13,-36.12) P2.42(26.67,-36.12) P2.42(31.75,-36.12) P2.43(19.05,-38.66) P2.43(24.13,-38.66) P2.44(26.67,-38.66) P2.44(31.75,-38.66) P2.45(19.05,-41.2) P2.45(24.13,-41.2) P2.46(26.67,-41.2) P2.46(31.75,-41.2) P2.47(19.05,-43.74) P2.47(24.13,-43.74) P2.48(26.67,-43.74) P2.48(31.75,-43.74) P2.49(19.05,-46.28) P2.49(24.13,-46.28) P2.50(26.67,-46.28) P2.50(31.75,-46.28)
  silkscreen extent -27.94,-47.55 27.94,17.14
TANT [mm] "Tantalio TH"
  rrect50% 2x2.2 hole 0.8: 1(-1.5,0)
  oval 2x2.2 hole 0.8: 2(1.5,0)
  silkscreen extent -1.74,-1 0.4,2
TO-220-3 [mm] "Encapsulado TH de 3 terminales"
  rect 1.8x3 hole 1: 1(-2.55,0)
  rrect50% 1.8x3 hole 1: 2(0,0) 3(2.55,0)
  silkscreen extent -5.79,-2.25 5.1,3.04
XLR_Ext [mm] "Cables para el XLR que va en el chasis"
  rect 2.34x4 hole 1.3: 1(-3.81,0)
  rrect50% 2.34x4 hole 1.3: 2(0,0) 3(3.81,0)
  silkscreen extent -6.07,-1.78 5.46,2.04

## Part data
C2 C3 C7 C8 C13 C14 C17 C20 C21 C22 C24 C26 C28 C31 C32 C33 C35 C37 C39 C40 C42 C43 C44 C45 C46 C47 C48 C49 C50 C51 C54 C55 C56 C57 C58 C59 C60 C62 C63 C64 C66 C67 C68 C69 C70 C71 C72 C73 C74 C75 C78 C79 C80 C81 C82 C83 C84 C86 C88 C90 C92 C93: library part Capacitor, "Capacitor de placas paralelas"
C5 C6 C9 C10 C11 C12 C15 C16 C18 C19 C23 C25 C27 C29 C30 C34 C36 C38 C41 C52 C53 C61 C65 C76 C77 C85 C87 C89 C91 C94: library part CapaPol, "Capacitor polarizado"
CN1: library part Conn_3_1, "Conector de 3 pines en hilera"
CN2 CN3: library part XLR_hembra, "XLR connector (canon) hembra"
D1 D2 D4 D6: library part Schottky, "Diodo Schottky"
D3 D5: library part TVS, "Diodo TVS"
F1 F2: library part EMI_3T, "Filtro EMI 3 terminales"
L1 L2: library part Inductor, "Inductor"
P1 P2: library part Poly, "Poly"
P3 P4: library part BNC, "BNC connector"
R1 R2 R3 R4 R5 R6 R7 R8 R9 R10 R11 R12 R13 R14 R15 R16 R17 R18 R19 R20 R21 R22 R23 R24 R25 R26 R27 R28 R29 R30 R31 R32 R33 R34 R35 R36 R37 R38 R39 R40 R41 R42 R43 R44 R45 R46 R47 R48 R49 R50 R51 R52 R53 R54 R55 R56 R57 R58 R59 R60 R61 R62 R63 R64 R65 R66 R67 R68 R69 R70 R71 R72 R73 R74 R75 R76 R77 R78 R79 R80: library part Resistor, "Resistencia"
U1 U2 U3 U4 U11: "Integrado con 4 operacionales"
U5 U7: library part LM7805, "Regulador lineal 5V"
U8: library part LM1117, "Regulador Switching"
U9: "CODEC 24 bits 192kHz"
U12: library part DDS_Pablo

## Free pads (board coordinates)
  rrect50% 78.74x78.74 hole 118.11: ""(88.58,88.58) ""(88.58,3848.43) ""(5816.93,88.58) ""(5816.93,3848.43)

## Via types
v1: diameter 70.87, hole 31.5, Top Layer to Bottom Layer, 113 vias

## Nets (pads, with @x,y where several pads share a name; then routed paths per layer and width w, separated by ;. In a path a pad name is that pad's centre, name@x,y a point inside that pad or via, vN(x,y) a via of type N, cw(c..) or ccw(c..) an arc to the next point about the centre after c; other vN are vias at no path point)
3V3: C89.1 C90.1 JP15.2 U9.22 U9.24 U9.25 | length 5288
  Top Layer w10: U9.22@3295.28,1352.36 3346.46,1352.36 3356.3,1362.2 3356.3,1403.54 ; U9.24@3295.28,1403.54 3356.3,1403.54 ; U9.25@3295.28,1429.13 3344.49,1429.13 3356.3,1417.32 3356.3,1403.54 ; v1(3410.43,1402.56) 3409.45,1403.54 3356.3,1403.54
  Top Layer w20: v1(2883.86,2716.54) 1968.5,2716.54 1938.98,2687.01 1938.98,2076.77 1958.66,2057.09 2834.65,2057.09 v1(2952.76,1938.98) ; v1(3410.43,1402.56) 3538.39,1402.56 3582.68,1358.27 3582.68,1003.94 3602.36,984.25 3651.57,984.25 ; C90.1@3651.57,1074.8 3651.57,984.25 ; C89.1@3789.37,1062.99 3789.37,1003.94 3769.69,984.25 3651.57,984.25
  Bottom Layer w20: v1(2883.86,2716.54) 3336.61,2716.54 3385.04,2764.96 JP15.2@3385.04,2844.49 ; v1(2952.76,1938.98) 3129.92,1938.98 3410.43,1658.46 v1(3410.43,1402.56)
5V: C6.1 C8.1 D6.1 JP14.1 U7.3 U8.3 | length 1605.3
  Bottom Layer w20: JP14.1@2738.07,3847.36 2982.28,3847.36 ; U7.3@2982.28,3761.81 2982.28,3847.36 ; C8.1@3336.61,3639.76 3336.61,3720.47 ; C6.1@3661.42,3641.73 3661.42,3720.47 ; U8.3@3731.73,3462.6 3731.73,3689.53 3700.79,3720.47 3661.42,3720.47 ; 2982.28,3847.36 D6.1@3336.61,3847.36 3336.61,3720.47 ; 3336.61,3720.47 3661.42,3720.47
5VDISC: JP16.2 U10.P2.3 U10.P2.4 | length 1212.9
  Bottom Layer w20: U10.P2.3@2118.9,2127.95 U10.P2.3@2118.9,2327.95 U10.P2.4@2118.9,2427.95 U10.P2.4@2118.9,2627.95 2118.9,2709.45 2145.67,2736.22 2431.1,2736.22 2559.06,2864.17 JP16.2@2686.22,2864.17
+15V: C2.1 C7.1 C16.1 D1.2 D3.2 D6.2 P1.2 R2.2 R4.2 U5.1 U7.1 | length 3741.8
  Top Layer w20: R2.2@2399.61,2824.8 2409.45,2834.65 2500,2834.65 2519.68,2854.33 2519.68,2952.76 2500,2972.44 C16.1@2421.26,2972.44 ; D6.2@3336.61,3357.36 3336.61,3021.65 3395.67,2962.6 3553.15,2962.6 3612.2,2903.54 v1(3612.2,2795.28) ; v1(3868.11,2795.28) R4.2@4086.61,2795.28
  Bottom Layer w20: P1.2@2401.57,3356.3 2509.84,3356.3 ; D3.2@2420.2,3139.76 2509.84,3139.76 ; C16.1@2421.26,2972.44 2490.16,2972.44 2509.84,2992.13 2509.84,3139.76 ; C2.1@2755.91,3187.01 2755.91,3356.3 ; C7.1@2755.91,3496.06 2755.91,3356.3 ; U5.1@2982.28,3190.94 2982.28,3356.3 ; U7.1@2982.28,3561.02 2982.28,3356.3 ; D1.2@3187.91,3356.3 2982.28,3356.3 ; D1.2@3191.1,3357.36 D6.2@3336.61,3357.36 ; v1(3612.2,2795.28) v1(3868.11,2795.28) ; 2509.84,3139.76 2509.84,3356.3 ; 2509.84,3356.3 2755.91,3356.3 ; 2755.91,3356.3 2982.28,3356.3
-15V: C15.2 D5.1 P2.2 R1.2 R3.2 | length 3785
  Top Layer w20: R1.2@1853.54,2972.44 C15.2@2027.56,2972.44 2027.56,2805.12 2066.93,2765.75 2440.94,2765.75 2460.63,2785.43 3041.34,2785.43 3110.24,2716.54 3651.57,2716.54 3828.74,2893.7 R3.2@4086.61,2893.7
  Bottom Layer w20: C15.2@2027.56,2972.44 2027.56,3031.5 2204.72,3208.66 2204.72,3602.36 ; P2.2@2401.57,3602.36 2204.72,3602.36 ; D5.1@2420.2,3779.53 2263.78,3779.53 2204.72,3720.47 2204.72,3602.36
AGND: C11.2 C12.2 C13.2 C14.2 C89.2 C90.2 L1.1 U9.7 U9.26 | length 5486.1
  Top Layer w10: U9.7@3023.62,1403.54 3076.77,1403.54 ; 3238.19,1466.54 3250,1454.72 U9.26@3295.28,1454.72 3584.65,1454.72
  Top Layer w20: L1.1@1604.33,2359.06 1814.17,2359.06 1889.76,2283.46 1889.76,2047.24 1919.29,2017.72 2076.77,2017.72 2096.46,1998.03 v1(2667.32,1998.03) ; v1(2903.54,1190.94) 2903.54,1112.2 2942.91,1072.83 v1(2942.91,1033.46) ; v1(3051.18,1761.81) 3090.55,1722.44 3090.55,1417.32 3076.77,1403.54 ; 3238.19,1466.54 3238.19,1643.7 v1(3267.72,1673.23) ; 3584.65,1454.72 3651.57,1387.8 3651.57,1269.68 ; C90.2@3651.57,1149.61 3651.57,1269.68 ; C89.2@3789.37,1181.1 3789.37,1240.16 3759.84,1269.68 3651.57,1269.68
  Bottom Layer w20: C13.2@2273.62,1005.91 2273.62,935.04 2303.15,905.51 2431.1,905.51 ; C11.2@2431.1,974.41 2431.1,905.51 ; C14.2@2578.74,1005.91 2578.74,905.51 2431.1,905.51 ; 2588.58,905.51 2812.5,905.51 2815.86,906.41 v1(2942.91,1033.46) ; v1(2667.32,1998.03) 2765.75,1998.03 3001.97,1761.81 v1(3051.18,1761.81) ; 2696.85,909.2 C12.2@2696.85,964.57 ; v1(2903.54,1190.94) 3051.18,1338.58 v1(3051.18,1761.81) ; v1(3267.72,1673.23) 3267.72,1722.44 3228.35,1761.81 v1(3051.18,1761.81)
AINL_N: JP9.1 U9.5 | length 571.5
  Top Layer w10: 2785.43,1454.72 U9.5@3023.62,1454.72
  Top Layer w20: v1@2612.2,1299.21 v1(2618.11,1299.21) ; v1@2629.92,1299.21 2785.43,1454.72
  Bottom Layer w20: JP9.1@2510.63,1299.21 v1(2618.11,1299.21)
AINL_P: JP8.2 U9.4 | length 530.9
  Top Layer w10: 2732.28,1480.32 U9.4@3023.62,1480.32
  Top Layer w20: v1(2618.11,1437.01) 2688.98,1437.01 2732.28,1480.32
  Bottom Layer w20: JP8.2@2510.63,1437.01 v1(2618.11,1437.01)
AINR_N: JP7.1 U9.3 | length 549.7
  Top Layer w10: 2785.43,1505.91 U9.3@3023.62,1505.91
  Top Layer w20: v1(2618.11,1594.49) 2696.85,1594.49 2785.43,1505.91
  Bottom Layer w20: JP7.1@2510.63,1594.49 v1(2618.11,1594.49)
AINR_P: JP6.2 U9.2 | length 629.1
  Top Layer w10: 2818.9,1531.5 U9.2@3023.62,1531.5
  Top Layer w20: v1(2618.11,1742.13) 2618.11,1692.91 2657.48,1653.54 2696.85,1653.54 2818.9,1531.5
  Bottom Layer w20: JP6.2@2510.63,1742.13 v1(2618.11,1742.13)
AVDD: C11.1 C12.1 C13.1 C14.1 JP14.2 R30.2 R44.2 U9.6 U9.8 | length 5570.3
  Top Layer w10: 2883.86,1377.95 U9.8@3023.62,1377.95 ; 2905.51,1429.13 U9.6@3023.62,1429.13
  Top Layer w20: v1(2746.06,1299.21) 2834.65,1299.21 2883.86,1348.43 2883.86,1377.95 2883.86,1407.48 2905.51,1429.13
  Bottom Layer w20: R30.2@2104.33,787.4 2145.67,787.4 2170.28,812.01 2170.28,866.14 2125.98,910.43 2125.98,1171.26 ; R44.2@2104.33,1712.6 2170.28,1712.6 ; C13.1@2273.62,1080.71 2273.62,1161.42 ; C11.1@2431.1,1092.52 2431.1,1161.42 ; C14.1@2578.74,1080.71 2578.74,1171.26 ; JP14.2@2637.01,3848.43 2539.37,3848.43 2509.84,3877.95 2253.94,3877.95 2106.3,3730.31 2106.3,3188.98 1879.92,2962.6 1879.92,2076.77 1929.13,2027.56 2135.83,2027.56 2170.28,1993.11 2170.28,1712.6 ; C12.1@2696.85,1102.36 2696.85,1171.26 ; v1(2746.06,1299.21) 2696.85,1250 2696.85,1171.26 ; 2125.98,1171.26 2125.98,1594.49 2170.28,1638.78 2170.28,1712.6 ; 2125.98,1171.26 2578.74,1171.26 ; 2578.74,1171.26 2696.85,1171.26
C\S\: U10.P1.7 U12.4 | length 2156.7
  Top Layer w20: v1(1525.59,226.38) v1(2318.9,226.38)
  Bottom Layer w20: U12.4@394.49,304.33 679.92,304.33 757.87,226.38 v1(1525.59,226.38) ; U10.P1.7@2318.9,127.95 v1(2318.9,226.38) U10.P1.7@2318.9,327.95
CCLK: U9.18 U10.P2.27 | length 1889.4
  Top Layer w10: U9.18@3295.28,1250 3366.14,1250 3385.83,1230.32 3385.83,1062.99 3405.51,1043.31 v1(3494.09,1043.31)
  Bottom Layer w20: U10.P2.27@3318.9,2327.95 U10.P2.27@3318.9,2127.95 3318.9,1996.06 3612.2,1702.76 3612.2,1072.83 3582.68,1043.31 v1(3494.09,1043.31)
CDTI: U9.17 U10.P2.31 | length 2039.3
  Top Layer w10: U9.17@3295.28,1224.41 3342.52,1224.41 3356.3,1210.63 3356.3,964.57 3375.98,944.88 v1(3494.09,944.88)
  Bottom Layer w20: v1(3494.09,944.88) 3612.2,944.88 3661.42,994.09 3661.42,1712.6 3518.9,1855.12 U10.P2.31@3518.9,2127.95 U10.P2.31@3518.9,2327.95
CSN: U9.19 U10.P2.25 | length 1666.8
  Top Layer w10: U9.19@3295.28,1275.59 3379.92,1275.59 3415.35,1240.16 3415.35,1171.26 3435.04,1151.57 v1(3494.09,1151.57)
  Bottom Layer w20: U10.P2.25@3218.9,2327.95 U10.P2.25@3218.9,2127.95 3218.9,2027.17 3562.99,1683.07 3562.99,1171.26 3543.31,1151.57 v1(3494.09,1151.57)
DGND: L2.2 U9.9 U9.20 U9.23 U10.P1.1 U10.P1.2 U10.P1.5 U10.P1.23 U10.P1.49 U10.P1.50 U10.P2.1 U10.P2.2 U10.P2.49 U10.P2.50 U12.6 U12.8 | length 13187.3
  Top Layer w10: 2923.23,1328.74 2946.85,1352.36 U9.9@3023.62,1352.36 ; U9.23@3295.28,1377.95 3238.19,1377.95 3238.19,1301.18 U9.20@3295.28,1301.18 3393.7,1301.18 3454.72,1240.16 v1(3494.09,1240.16)
  Top Layer w20: v1(2824.8,1230.31) 2923.23,1328.74 ; L2.2@4199.61,1535.43 4114.17,1535.43 ; v1(4212.6,836.61) 4143.7,836.61 4114.17,866.14 4114.17,1535.43 ; v1(4212.6,1958.66) 4143.7,1958.66 4114.17,1929.13 4114.17,1535.43
  Bottom Layer w10: U10.P1.23@3118.9,327.95 3166.14,327.95 3166.14,698.82 ; 3415.35,1220.47 3435.04,1240.16 v1(3494.09,1240.16)
  Bottom Layer w20: U12.8@394.49,104.33 527.56,104.33 541.34,118.11 541.34,157.48 ; U12.6@394.49,204.33 519.29,204.33 541.34,182.28 541.34,157.48 ; U10.P1.2@2018.9,627.95 U10.P1.2@2018.9,427.95 U10.P1.1@2018.9,327.95 U10.P1.1@2018.9,127.95 2018.9,38.18 ; U10.P2.2@2018.9,2627.95 U10.P2.2@2018.9,2427.95 U10.P2.1@2018.9,2327.95 U10.P2.1@2018.9,2127.95 2018.9,2072.06 2033.87,2057.09 2500,2057.09 2696.85,1860.24 2696.85,1505.91 2824.8,1377.95 v1(2824.8,1230.31) 2824.8,1181.1 2866.39,1139.51 3415.35,1139.51 ; 2218.9,43.7 U10.P1.5@2218.9,127.95 U10.P1.5@2218.9,327.95 ; 3118.9,39.37 U10.P1.23@3118.9,127.95 U10.P1.23@3118.9,327.95 ; 3166.14,698.82 3235.04,767.72 3385.83,767.72 3415.35,797.24 3415.35,1139.51 ; 3415.35,1220.47 3415.35,1139.51 ; v1(4212.6,836.61) 4389.76,836.61 4418.9,807.48 U10.P1.50@4418.9,627.95 U10.P1.50@4418.9,427.95 U10.P1.49@4418.9,327.95 U10.P1.49@4418.9,127.95 4418.9,58.66 4398.42,38.18 2018.9,38.18 ; v1(4212.6,1958.66) 4350.39,1958.66 4418.9,2027.17 U10.P2.49@4418.9,2127.95 U10.P2.49@4418.9,2327.95 U10.P2.50@4418.9,2427.95 U10.P2.50@4418.9,2627.95 ; 541.34,157.48 1791.34,157.48 1910.63,38.18 2018.9,38.18
GROUND: ?.@3993.31,3044.88 ?.@4093.31,3044.88 ?.@4193.31,3044.88 ?.@4293.31,3044.88 ?.@4393.31,3044.88 ?.@4493.31,3044.88 ?.@4593.31,3044.88 ?.@4693.31,3044.88 ?.@4793.31,3044.88 ?.@4893.31,3044.88 ?.@4993.31,3044.88 ?.@5093.31,3044.88 ?.@5193.31,3044.88 ?.@5293.31,3044.88 ?.@5393.31,3044.88 ?.@5493.31,3044.88 ?.@5593.31,3044.88 ?.@5693.31,3044.88 ?.@5693.31,3144.88 ?.@5693.31,3244.88 ?.@5693.31,3344.88 ?.@5693.31,3444.88 ?.@5693.31,3544.88 ?.@5693.31,3644.88 ?.@5693.31,3744.88 ?.@5693.31,3844.88 C2.2 C3.2 C5.2 C6.2 C7.2 C8.2 C9.2 C10.1 C15.1 C16.2 C19.2 C20.2 C21.2 C23.1 C26.2 C27.2 C30.2 C31.2 C32.2 C34.1 C37.2 C38.2 C44.1 C45.1 C46.1 C47.2 C49.2 C52.2 C54.2 C56.2 C57.1 C58.1 C59.1 C60.2 C61.1 C68.1 C69.1 C70.1 C71.2 C73.2 C76.2 C78.2 C80.2 C81.1 C82.1 C83.1 C84.2 C85.1 C87.2 C88.2 C91.2 C92.2 C93.2 C94.1 CN1.2 CN2.1 CN2.3 CN3.1 CN3.3 D3.1 D5.2 F1.2 F2.2 L1.2 L2.1 P3.2 P4.2 R7.1 R10.2 R11.2 R14.1 R17.2 R18.2 R32.1 R46.1 R49.1 R53.2 R58.1 R61.1 R63.2 R66.1 R70.2 R75.1 R78.1 R80.2 U2.2 U2.3 U2.12 U3.2 U3.3 U3.12 U4.5 U4.6 U5.2 U7.2 U8.1 U11.5 U11.6 | length 45095.9
  Top Layer w20: R7.1@305.12,1090.55 C91.2@305.12,1220.47 433.07,1220.47 442.91,1230.31 C92.2@442.91,1271.65 ; R14.1@305.12,1783.46 C94.1@305.12,1663.39 433.07,1663.39 442.91,1653.54 C93.2@442.91,1612.2 ; v1(452.76,1840.55) R17.2@523.62,1840.55 ; v1(454.72,1033.46) R10.2@525.59,1033.46 ; v1(838.58,925.2) 925.2,925.2 944.88,944.88 944.88,1033.46 R11.2@893.7,1033.46 ; v1(846.46,1938.98) 925.2,1938.98 944.88,1919.29 944.88,1860.24 925.2,1840.55 R18.2@874.02,1840.55 ; U3.2@1600.79,737.14 1600.79,825.2 ; U2.2@1612.6,1662.34 1612.6,1750.39 ; U3.3@1650.79,737.14 1650.79,807.87 1631.89,826.77 1523.62,826.77 1503.94,807.09 1503.94,696.85 1476.38,669.29 C27.2@1395.67,669.29 1328.74,669.29 1318.9,679.13 1318.9,984.25 1338.58,1003.94 C23.1@1395.67,1003.94 1466.54,1003.94 1476.38,994.09 1476.38,925.2 1486.22,915.35 1631.89,915.35 1650.79,934.25 U3.12@1650.79,995.14 ; U2.3@1662.6,1662.34 1662.6,1733.07 1643.7,1751.97 1535.43,1751.97 1515.75,1732.28 1515.75,1614.17 1496.06,1594.49 1348.43,1594.49 1328.74,1614.17 1328.74,1919.29 1338.58,1929.13 C34.1@1407.48,1929.13 1478.35,1929.13 1488.19,1919.29 1488.19,1850.39 1498.03,1840.55 1643.7,1840.55 1662.6,1859.45 U2.12@1662.6,1920.34 ; D3.1@1930.2,3139.76 2096.46,3139.76 2145.67,3090.55 C15.1@2145.67,2972.44 ; v1(2057.09,1505.91) v1(2214.57,1505.91) ; v1(2549.21,1879.92) 2795.28,1879.92 ; C87.2@2795.28,1801.18 2795.28,1879.92 ; C88.2@2923.23,1779.53 2923.23,1860.24 2903.54,1879.92 2795.28,1879.92 ; C9.2@3435.04,3198.82 3533.46,3198.82 3779.53,2952.76 4438.98,2952.76 4547.24,2844.49 v1(4547.24,2814.96) ; L2.1@4599.61,1535.43 4748.03,1535.43 ; C73.2@4637.8,2716.54 4547.24,2716.54 v1(4547.24,2814.96) ; R75.1@4637.8,2814.96 v1(4547.24,2814.96) ; C49.2@4667.32,1251.05 v1(4576.77,1251.05) 4576.77,1349.47 ; R58.1@4667.32,1349.47 4576.77,1349.47 ; R78.1@4744.09,2478.35 v1(4744.09,2568.9) ; R66.1@4748.03,1675.2 4748.03,1535.43 ; R61.1@4773.62,1012.86 v1(4773.62,1103.41) ; R49.1@4783.46,209.71 v1(4783.46,98.43) 4783.46,68.9 4803.15,49.21 5177.17,49.21 ; C81.1@5039.37,2478.35 5039.37,2539.37 5068.9,2568.9 5137.8,2568.9 ; C69.1@5043.31,1675.2 5043.31,1535.43 ; C57.1@5068.9,1012.86 5068.9,1073.88 5098.42,1103.41 5167.32,1103.41 ; 5078.74,49.21 C44.1@5078.74,209.71 ; C82.1@5137.8,2478.35 5137.8,2568.9 ; C70.1@5141.73,1675.2 5141.73,1535.43 ; C58.1@5167.32,1012.86 5167.32,1103.41 ; C45.1@5177.17,209.71 5177.17,49.21 ; U11.5@5190.16,1946.72 5190.16,2017.46 5199.21,2026.51 5240.16,2026.51 ; U4.5@5219.68,482.28 5219.68,553.02 5269.68,553.02 ; C83.1@5236.22,2478.35 v1(5236.22,2568.9) ; C68.1@5240.16,1675.2 5240.16,1535.43 ; U11.6@5240.16,1946.72 5240.16,2026.51 ; C59.1@5265.75,1012.86 v1(5265.75,1103.41) ; U4.6@5269.68,482.28 5269.68,551.18 5525.06,551.18 5543.7,532.54 5543.7,61.42 5531.5,49.21 5374.02,49.21 ; C46.1@5275.59,209.71 5275.59,49.21 ; C84.2@5334.65,2478.35 5334.65,2568.9 ; C71.2@5338.58,1675.2 5338.58,1535.43 ; C60.2@5364.17,1012.86 5364.17,1103.41 ; C47.2@5374.02,209.71 5374.02,49.21 ; R80.2@5442.91,2478.35 5442.91,2539.37 5413.39,2568.9 5334.65,2568.9 ; R70.2@5446.85,1675.2 5446.85,1535.43 ; R63.2@5472.44,1012.86 5472.44,1073.88 5442.91,1103.41 5364.17,1103.41 ; 5482.28,49.21 R53.2@5482.28,209.71 ; 4576.77,1349.47 4576.77,1407.48 4606.3,1437.01 4734.25,1437.01 4748.03,1450.79 4748.03,1535.43 ; 4748.03,1535.43 5043.31,1535.43 ; 5043.31,1535.43 5141.73,1535.43 ; 5137.8,2568.9 v1(5236.22,2568.9) ; 5141.73,1535.43 5240.16,1535.43 ; 5167.32,1103.41 v1(5265.75,1103.41) ; 5177.17,49.21 5275.59,49.21 ; v1(5236.22,2568.9) 5334.65,2568.9 ; 5240.16,1535.43 5338.58,1535.43 ; 5240.16,2026.51 5484.65,2026.51 5514.17,1996.98 5514.17,1553.54 5496.06,1535.43 5446.85,1535.43 ; v1(5265.75,1103.41) 5364.17,1103.41 ; 5275.59,49.21 5374.02,49.21 ; 5338.58,1535.43 5446.85,1535.43
  Bottom Layer w10: CN2.1@142.52,986.61 51.57,986.61 51.57,1921.65 CN3.3@147.64,1921.65 ; 243.7,1621.65 243.7,1661.02
  Bottom Layer w20: 59.06,1291.73 CN2.3@147.64,1291.73 147.64,1220.47 246.06,1220.47 C91.2@305.12,1220.47 442.91,1220.47 454.72,1208.66 v1(454.72,1033.46) 454.72,942.91 472.44,925.2 v1(838.58,925.2) ; 59.06,1621.65 CN3.1@147.64,1621.65 243.7,1621.65 ; CN2.1@147.64,991.73 147.64,669.29 C27.2@1395.67,669.29 1393.7,667.32 1393.7,610.24 1403.54,600.39 1492.13,600.39 ; CN3.3@147.64,1921.65 147.64,2194.88 59.06,2283.46 59.06,3336.61 CN1.2@147.64,3336.61 1131.89,3336.61 ; 246.06,1663.39 C94.1@305.12,1663.39 442.91,1663.39 452.76,1673.23 v1(452.76,1840.55) 452.76,1909.45 482.28,1938.98 v1(846.46,1938.98) ; C23.1@1395.67,1003.94 1631.89,1003.94 ; C34.1@1407.48,1929.13 1643.7,1929.13 ; C38.2@1409.45,1594.49 1407.48,1592.52 1407.48,1535.43 1417.32,1525.59 1505.91,1525.59 ; C26.2@1492.13,661.42 1492.13,600.39 ; C37.2@1505.91,1586.61 1505.91,1525.59 ; C21.2@1580.71,944.88 1622.05,944.88 1631.89,954.72 1631.89,1003.94 ; C32.2@1592.52,1870.08 1633.86,1870.08 1643.7,1879.92 1643.7,1929.13 ; R32.1@1600.39,661.42 1600.39,610.24 1590.55,600.39 1492.13,600.39 ; L1.2@1604.33,2759.06 1604.33,3080.71 ; R46.1@1614.17,1586.61 1614.17,1525.59 ; C20.2@1781.5,944.88 1740.16,944.88 1730.31,954.72 1730.31,1003.94 ; C31.2@1793.31,1870.08 1751.97,1870.08 1742.13,1879.92 1742.13,1929.13 ; D3.1@1930.2,3139.76 1633.86,3139.76 1604.33,3110.24 1604.33,3080.71 ; D5.2@1930.2,3779.53 1830.71,3779.53 1643.7,3592.52 F2.2@1486.22,3592.52 1161.42,3592.52 1131.89,3562.99 C10.1@1131.89,3494.09 1131.89,3336.61 ; C30.2@1988.19,1929.13 1742.13,1929.13 ; v1(2057.09,1505.91) 1948.82,1505.91 1899.61,1456.69 1899.61,1092.52 ; C15.1@2145.67,2972.44 C16.2@2303.15,2972.44 2303.15,2923.23 2322.83,2903.54 2529.53,2903.54 2657.48,3031.5 2755.91,3031.5 ; v1(2214.57,1505.91) 2214.57,1860.24 2332.68,1978.35 2450.79,1978.35 v1(2549.21,1879.92) ; C2.2@2755.91,3112.2 2755.91,3031.5 ; C7.2@2755.91,3570.87 2755.91,3651.57 2765.75,3661.42 U7.2@2982.28,3661.42 3159.45,3661.42 3179.13,3641.73 3179.13,3513.78 3208.66,3484.25 3336.61,3484.25 ; 3179.13,3228.35 3129.92,3228.35 3100.39,3198.82 3100.39,3110.24 3080.71,3090.55 U5.2@2982.28,3090.55 2883.86,3090.55 2824.8,3031.5 2755.91,3031.5 ; C3.2@3188.98,3147.64 3188.98,3228.35 3316.93,3228.35 3346.46,3198.82 C9.2@3415.35,3198.82 3415.35,3257.87 3444.88,3287.4 3444.88,3484.25 ; C8.2@3336.61,3564.96 3336.61,3484.25 ; C6.2@3543.31,3641.73 3464.57,3641.73 3444.88,3622.05 3444.88,3562.99 ; U8.1@3551.73,3462.6 3551.73,3554.57 3543.31,3562.99 3444.88,3562.99 ; ?.@3993.31,3044.88 ?.@4093.31,3044.88 ?.@4193.31,3044.88 ?.@4293.31,3044.88 ?.@4393.31,3044.88 ?.@4493.31,3044.88 ?.@4593.31,3044.88 ?.@4693.31,3044.88 ?.@4793.31,3044.88 ?.@4893.31,3044.88 ?.@4993.31,3044.88 ?.@5093.31,3044.88 ?.@5193.31,3044.88 ?.@5293.31,3044.88 ?.@5393.31,3044.88 ?.@5493.31,3044.88 ?.@5593.31,3044.88 ?.@5693.31,3044.88 ; 4568.77,730.44 4710.63,730.44 4724.41,716.66 C54.2@4724.41,658.53 ; v1(4576.77,1251.05) 4576.77,1104.46 ; C76.2@4586.61,2135.83 4586.61,2194.88 ; C85.1@4596.46,2470.47 4596.46,2568.9 ; C52.2@4625.98,670.34 4625.98,726.5 ; C61.1@4625.98,1004.98 4625.98,1098.55 ; C78.2@4694.88,2114.17 4694.88,2175.2 4675.2,2194.88 4586.61,2194.88 ; C80.2@4694.88,2438.98 4694.88,2568.9 ; C56.2@4724.41,983.33 4724.41,1098.55 ; v1(5236.22,2568.9) 5137.8,2568.9 5068.9,2637.8 4881.89,2637.8 4812.99,2568.9 v1(4744.09,2568.9) 4694.88,2568.9 ; v1(5265.75,1103.41) 5174.28,1103.41 5104.33,1173.35 4917.32,1173.35 4848.42,1104.46 4576.77,1104.46 ; ?.@5693.31,3844.88 ?.@5693.31,3744.88 ?.@5693.31,3644.88 ?.@5693.31,3544.88 ?.@5693.31,3444.88 ?.@5693.31,3344.88 ?.@5693.31,3244.88 ?.@5693.31,3144.88 ?.@5693.31,3044.88 ; P4.2@5757.87,2021.46 5862.4,2021.46 ; 1131.89,3336.61 C5.2@1131.89,3179.13 1131.89,3110.24 1161.42,3080.71 F1.2@1496.06,3080.71 1604.33,3080.71 ; 1505.91,1525.59 1614.17,1525.59 ; 1614.17,1525.59 1732.28,1525.59 1742.13,1515.75 1742.13,1102.36 1751.97,1092.52 1899.61,1092.52 ; 1631.89,1003.94 1730.31,1003.94 ; 1643.7,1929.13 1742.13,1929.13 ; 1730.31,1003.94 C19.2@1976.38,1003.94 1976.38,1064.96 1968.5,1072.83 1899.61,1072.83 1899.61,1092.52 ; 3336.61,3484.25 3444.88,3484.25 ; 3444.88,3484.25 3444.88,3562.99 ; 4547.24,2568.9 4517.72,2539.37 4517.72,2194.88 4586.61,2194.88 ; 4547.24,2568.9 4596.46,2568.9 ; 4547.24,2568.9 v1(4547.24,2814.96) 4547.24,2942.91 5856.3,2942.91 5862.4,2949.02 ; 4576.77,1104.46 4566.68,1094.36 4566.68,502.22 4665.35,403.54 4665.35,147.64 4714.57,98.43 v1(4783.46,98.43) 4832.68,49.21 5639.76,49.21 5757.87,167.32 P3.2@5757.87,564.76 5862.4,564.76 5862.4,2021.46 ; 4596.46,2568.9 4694.88,2568.9 ; ?.@5693.31,3044.88 5842.91,3044.88 5862.4,3025.39 5862.4,2949.02 ; 5862.4,2021.46 5862.4,2949.02
I2S2_SD: JP5.1 U10.P1.9 | length 1421
  Top Layer w20: v1(2470.47,757.87) 2598.43,757.87 2706.69,866.14 v1(2923.23,866.14)
  Bottom Layer w10: U10.P1.9@2418.9,327.95 2467.32,327.95 2470.47,331.1 v1(2470.47,757.87)
  Bottom Layer w20: U10.P1.9@2418.9,127.95 U10.P1.9@2418.9,327.95 ; v1(2923.23,866.14) 3070.87,866.14 3088.98,884.25 JP5.1@3088.98,954.72
I2S3_CK: U9.12 U10.P2.37 | length 1678.1
  Top Layer w10: U9.12@3023.62,1275.59 3125.98,1275.59
  Top Layer w20: 3125.98,1275.59 3169.29,1318.9 3169.29,1811.02 3297.24,1938.98 v1(3700.79,1938.98)
  Bottom Layer w20: v1(3700.79,1938.98) 3818.9,2057.09 U10.P2.37@3818.9,2127.95 U10.P2.37@3818.9,2327.95
I2S3_EXT_SD: JP5.3 U10.P2.38 | length 2414.3
  Top Layer w20: v1(3346.46,826.77) v1(3494.09,826.77)
  Bottom Layer w10: U10.P2.38@3818.9,2427.95 3868.11,2427.95 3868.11,2047.24
  Bottom Layer w20: JP5.3@3288.98,954.72 3288.98,844.88 3307.09,826.77 v1(3346.46,826.77) ; v1(3494.09,826.77) 3641.73,826.77 3710.63,895.67 3710.63,1683.07 3759.84,1732.28 3759.84,1929.13 3868.11,2037.4 3868.11,2047.24 ; U10.P2.38@3818.9,2427.95 U10.P2.38@3818.9,2627.95
I2S3_MCK: U9.10 U10.P2.48 | length 2759.3
  Top Layer w10: U9.10@3023.62,1326.77 3108.27,1326.77
  Top Layer w20: 3108.27,1326.77 3129.92,1348.43 3129.92,1860.24 3297.24,2027.56 v1(4124.02,2027.56)
  Bottom Layer w10: U10.P2.48@4318.9,2627.95 4370.08,2627.95 4370.08,2076.77 4345.47,2052.17
  Bottom Layer w20: v1(4124.02,2027.56) 4320.87,2027.56 4345.47,2052.17 ; U10.P2.48@4318.9,2427.95 U10.P2.48@4318.9,2627.95
I2S3_SD: U9.13 U10.P2.35 | length 1601.2
  Top Layer w10: U9.13@3023.62,1250 3149.61,1250
  Top Layer w20: 3149.61,1250 3208.66,1309.06 3208.66,1771.65 3307.09,1870.08 v1(3582.68,1870.08)
  Bottom Layer w20: v1(3582.68,1870.08) 3582.68,1929.13 3718.9,2065.35 U10.P2.35@3718.9,2127.95 U10.P2.35@3718.9,2327.95
I2S3_WS: U9.11 U10.P1.16 | length 1212.5
  Top Layer w10: 2962.6,1289.37 2974.41,1301.18 U9.11@3023.62,1301.18
  Top Layer w20: v1(2718.9,748.03) 2903.54,748.03 3021.65,866.14 3021.65,1062.99 2962.6,1122.05 2962.6,1289.37
  Bottom Layer w20: U10.P1.16@2718.9,427.95 U10.P1.16@2718.9,627.95 v1@2718.9,775.2
I2S_SD: JP5.2 U9.14 | length 403.9
  Top Layer w10: U9.14@3023.62,1224.41 3135.83,1224.41
  Top Layer w20: 3135.83,1224.41 3188.98,1171.26 v1(3188.98,1082.68)
  Bottom Layer w20: JP5.2@3188.98,954.72 v1(3188.98,1082.68)